# Altium PCB digital.PcbDoc (part 2 of 3)
Units mm, origin at the board's own origin, x right, y up, seen from the top; angles counter-clockwise.
Board outline 25.2 x 25.2 mm, 4 copper layers (Top Layer, Inner Layer 1, Inner Layer 2, Bottom Layer), stack 1.51 mm thick; 75 components, 68 nets, 309 pads, 118 vias.
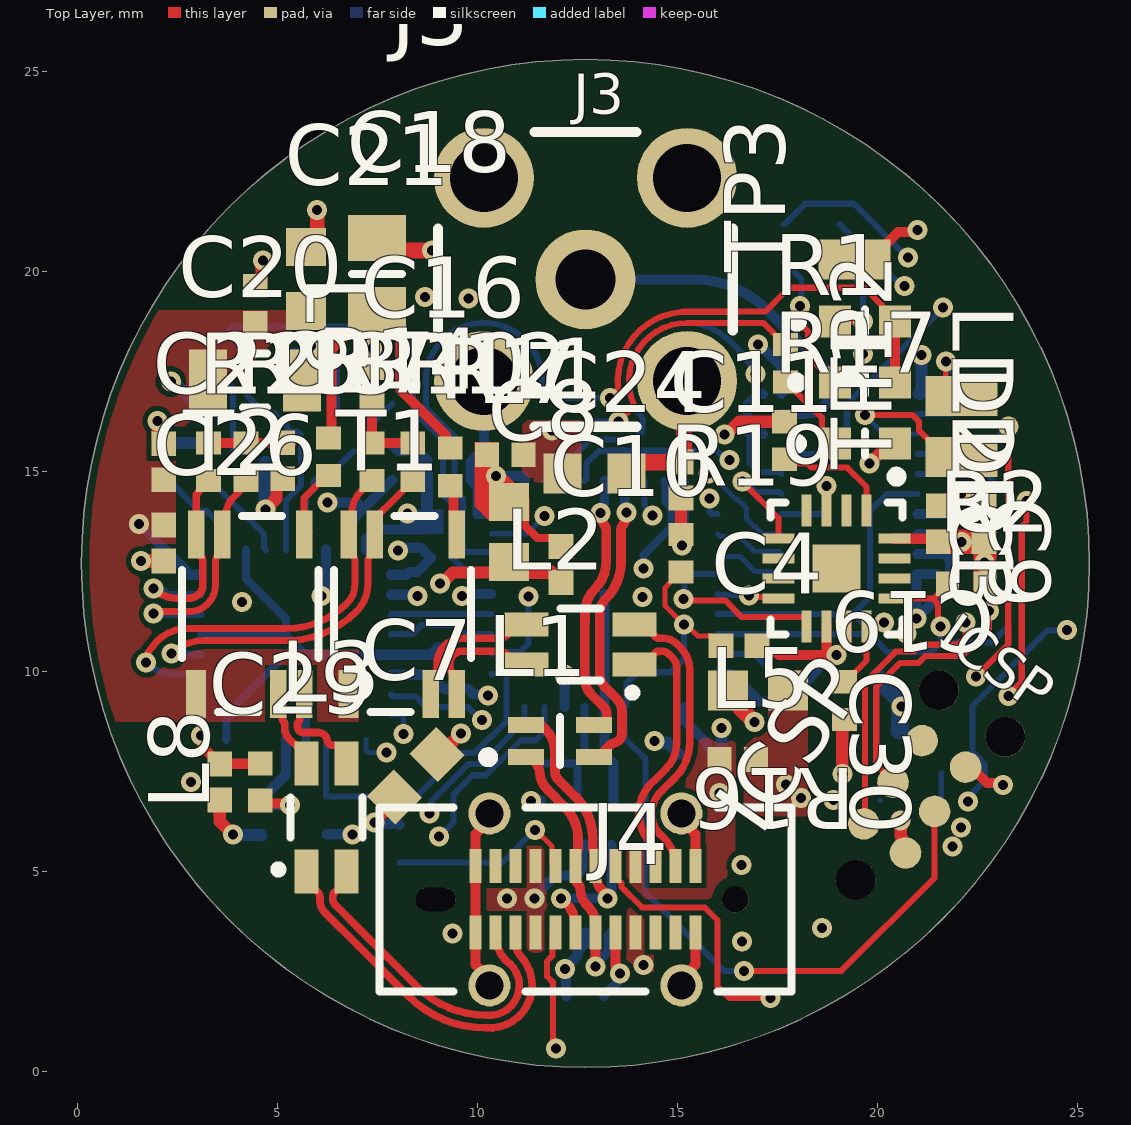
[diagram p0: Top Layer view]

## Part data (continued)
TP1 TP2 TP3: "Conn Terminal Post 1 POS Solder ST SMD 1 Port T/R", Color=Natural, Manufacturer=Harwin, Supplier Part Number 1=952-2665-1-ND, Body Material=Brass, Category="Headers and Wire Housings", ComponentLink1Description=https://cdn.harwin.com/pdfs/Harwin_PC_PCB_Hardware.pdf?src-supplier=Digi-Key, ComponentLink1URL=https://cdn.harwin.com/pdfs/Harwin_PC_PCB_Hardware.pdf?src-supplier=Digi-Key, ComponentLink2Description=https://cdn.harwin.com/pdfs/Harwin_PC_PCB_Hardware.pdf?src-supplier=Avnet+Europe, ComponentLink2URL=https://cdn.harwin.com/pdfs/Harwin_PC_PCB_Hardware.pdf?src-supplier=Avnet+Europe, ComponentLink3Description=https://cdn.harwin.com/pdfs/Harwin_PC_PCB_Hardware.pdf?src-supplier=Mouser, ComponentLink3URL=https://cdn.harwin.com/pdfs/Harwin_PC_PCB_Hardware.pdf?src-supplier=Mouser, ComponentLink4Description=https://cdn.harwin.com/pdfs/S2761R.pdf?src-supplier=Digi-Key, ComponentLink4URL=https://cdn.harwin.com/pdfs/S2761R.pdf?src-supplier=Digi-Key, ComponentLink5Description=https://cdn.harwin.com/pdfs/Harwin_PC_PCB_Hardware.pdf?src-supplier=TTI, ComponentLink5URL=https://cdn.harwin.com/pdfs/Harwin_PC_PCB_Hardware.pdf?src-supplier=TTI, Manufacturer Part Number=S2761-46R, Material="Copper Alloy", Mount="Surface Mount", Packaging="Tape and Reel", Plating=Tin, Pricing 1="1=0,28000, 10=0,23500, 25=0,20760, 50=0,19060, 100=0,18310, 250=0,16444, 500=0,15696, 1000=0,13080 (USD)", RoHS=Yes, RoHS Compliant=Yes, Stock 1=101371, Supplier 1=Digi-Key
U1: "ARM Cortex-M3 32-bit MCU, 64 KB Flash, 20 KB Internal RAM, 26 I/Os, 36-pin VFQFPN, -40 to 85 degC, Tray", I/Os (High Current)=26, Operating Frequency(F) (Processor speed) (MHz)=72, Supply Voltage(Vcc) min (V)=2, A/D Converter="2x12-bit (10 Channel)", ComponentLink1Description="Manufacturer URL", ComponentLink1URL=http://www.st.com/web/en/home.html, ComponentLink2Description=Datasheet, ComponentLink2URL=http://www.st.com/st-web-ui/static/active/en/resource/technical/document/datasheet/CD00161566.pdf, ComponentLink3Description="Package Specification", ComponentLink3URL=http://www.st.com/st-web-ui/static/active/en/resource/technical/document/datasheet/CD00161561.pdf, Core="ARM Cortex-M3", DatasheetVersion="Rev. 16", FLASH Size (Prog) (kB)=64, Internal RAM Size (kB)=20, Mounting Technology="Surface Mount", PackageDescription="36-Pin Quad Flat No-Lead, 6 x 6 x 1.0 mm Body, 0.5 mm Pitch, Exposed Pad", PackageReference=VFQFPN36, PackageVersion="Rev. 16, 08/2013", Packing=Tray, PartNumber=STM32F103T8U6
X1: library part FA-20H25.0000MD30Y-C5, "Crystal 25MHz 30PPM -30C +85C 18pF", Case/Package=SMD/SMT, ESR (Equivalent Series Resistance)=80R, Frequency Stability=30ppm, Load Capacitance=18pF, Manufacturer=Epson, Max Operating Temperature=85°C, Min Operating Temperature=-30°C, Package Quantity=3000, Supplier Part Number 1=SER4238CT-ND, Category=Crystals, ComponentLink1Description=http://www.mouser.com/ds/2/137/A-20H_en-932938.pdf?src-supplier=Mouser, ComponentLink1URL=http://www.mouser.com/ds/2/137/A-20H_en-932938.pdf?src-supplier=Mouser, ComponentLink2Description=https://support.epson.biz/td/api/doc_check.php?dl=brief_FA-20H&amp;lang=en&src-supplier=Digi-Key, ComponentLink2URL=https://support.epson.biz/td/api/doc_check.php?dl=brief_FA-20H&amp;lang=en&src-supplier=Digi-Key, ComponentLink3Description=https://support.epson.biz/td/api/doc_check.php?dl=brief_FA-20H_en.pdf&src-supplier=Digi-Key, ComponentLink3URL=https://support.epson.biz/td/api/doc_check.php?dl=brief_FA-20H_en.pdf&src-supplier=Digi-Key, Frequency=25MHz, Frequency Tolerance=30ppm, Height=0.022inch, Length=0.098inch, Manufacturer Part Number=FA-20H25.0000MD30Y-C5, Mount="Surface Mount", Packaging="Tape and Reel", Pricing 1="1=0,42000, 10=0,35000, 50=0,31500, 100=0,28000, 500=0,26600, 1000=0,22400 (USD)", RoHS=Yes, Stock 1=10015, Supplier 1=Digi-Key, Termination=SMD/SMT, Tolerance=30ppm, Weight=0.000459oz, Width=0.079inch

## Via types
v1: diameter 0.5, hole 0.25, Top Layer to Bottom Layer, tented both sides, 118 vias

## Nets (pads, with @x,y where several pads share a name; then routed paths per layer and width w, separated by ;. In a path a pad name is that pad's centre, name@x,y a point inside that pad or via, vN(x,y) a via of type N, cw(c..) or ccw(c..) an arc to the next point about the centre after c; other vN are vias at no path point)
AFE_TYPE_IND: J2.6 U1.17 | length 8.7
  Inner Layer 2 w0.152: v1(11.678,13.883) 12.747,14.952 v1(15.775,14.952)
  Bottom Layer w0.127: U1.17@10.352,13.438 10.356,13.442 11.238,13.442 v1(11.678,13.883) ; v1(15.775,14.952) 15.806,14.952 16.455,14.303 16.506,14.303 16.726,14.083 16.726,13.819 16.925,13.621 16.944,13.621 17.129,13.436 J2.6@17.604,13.436
CAL_SIGNAL: J2.14 U1.8 | length 39.5
  Top Layer w0.152: v1(23.282,9.382) 23.282,9.414 23.608,9.74 23.608,13.626 23.727,13.744 23.727,14.252 v1(23.722,14.256)
  Inner Layer 2 w0.152: v1(9.042,5.867) 9.322,6.147 9.322,6.896 9.851,7.425 16.298,7.425 16.506,7.218 16.506,6.619 17.519,5.606 19.235,5.606 22.801,9.172 22.999,9.172 23.209,9.382 v1(23.282,9.382) ; v1(21.633,19.099) 22.715,18.018 22.715,17.323 23.731,16.307 23.731,15.932 ; v1(23.722,14.256) 23.73,14.264 23.73,15.931
  Bottom Layer w0.152: v1(9.042,5.867) 9.397,6.222 9.397,6.919 9.882,7.404 10.213,7.404 11.09,8.28 11.455,8.28 11.677,8.502 U1.8@11.677,9.113 ; J2.14@17.604,15.436 18.728,15.436 19.232,15.94 19.232,16.679 21.633,19.081 v1(21.633,19.099)
DAC0_OUT: IC3.3 J2.8 | length 2.3
  Top Layer w0.152: IC3.3@18.726,14.019 v1@18.726,14.609
  Bottom Layer w0.152: J2.8@17.604,13.936 18.584,13.936 18.726,14.078 v1@18.726,14.609
  other v1: 18.726,14.64
DAC1_OUT: IC3.5 J2.10 | length 2.9
  Top Layer w0.152: v1(16.632,14.748) 16.632,14.73 17.526,13.836 IC3.5@17.526,13.319
  Bottom Layer w0.152: v1(16.632,14.748) 16.704,14.748 16.967,14.485 17.555,14.485 J2.10@17.604,14.436
DAC_LAT0: IC3.9 U1.31 | length 4.9
  Top Layer w0.152: v1(15.145,11.806) 15.176,11.775 16.19,11.775 16.6,11.366 18.177,11.366 18.177,11.379 18.226,11.33 IC3.9@18.226,11.119
  Bottom Layer w0.152: v1(15.145,11.806) 15.176,11.837 15.176,12.281 15.334,12.438 U1.31@16.002,12.438
DAC_LAT1: IC3.8 U1.32 | length 1.6
  Top Layer w0.152: v1(16.792,11.893) 16.829,11.856 17.489,11.856 IC3.8@17.526,11.819
  Bottom Layer w0.152: U1.32@16.002,11.938 16.024,11.916 16.77,11.916 v1(16.792,11.893)